# Altium PCB 25H_V2.PcbDoc
Units mm, origin at the board's own origin, x right, y up, seen from the top; angles counter-clockwise.
Board outline 152.4 x 101.6 mm, 2 copper layers (Top Layer, Bottom Layer); 11 components, 18 nets, 69 pads, 9 vias.
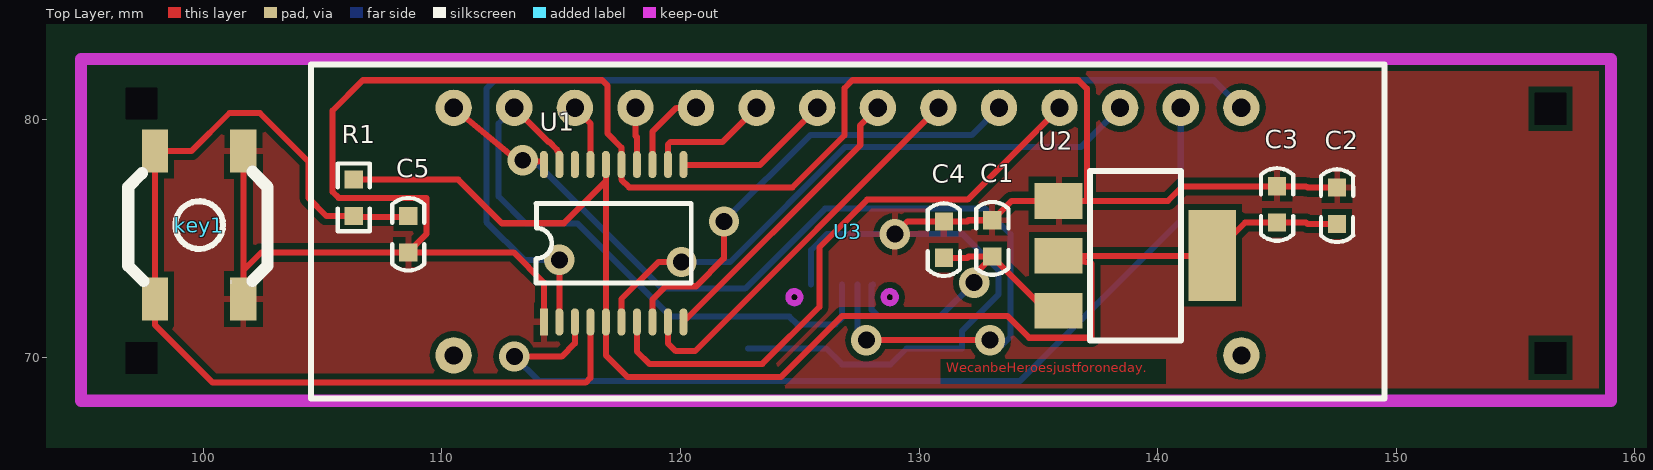
[diagram p0: Top Layer view]
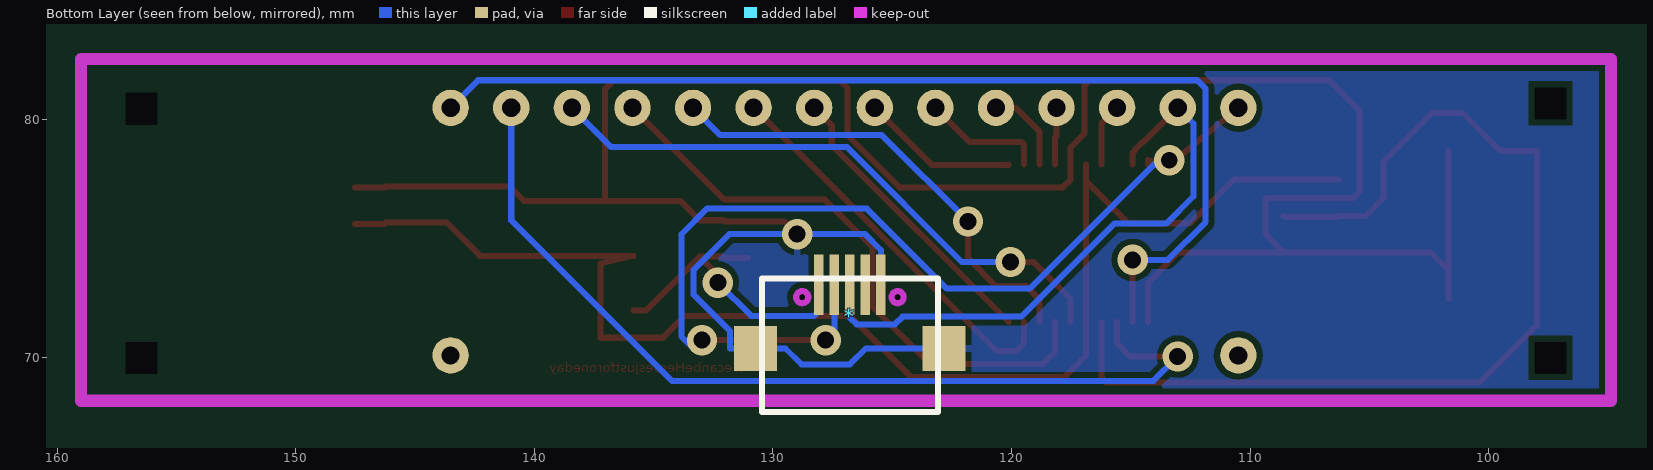
[diagram p1: Bottom Layer view, seen from below]
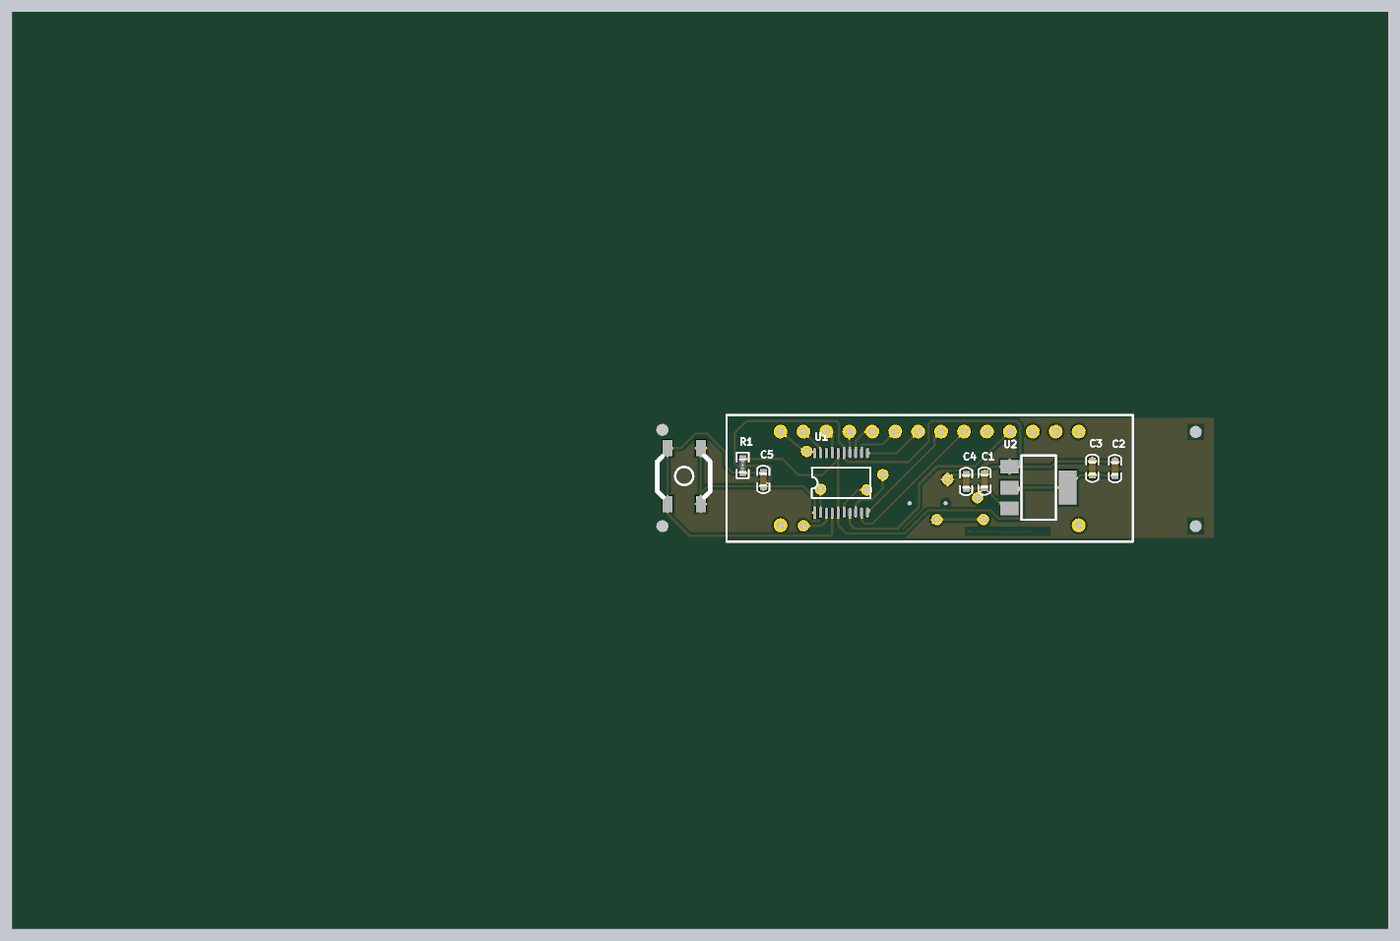
[diagram p2: 3D render of the assembled board from above, using the file's embedded part models]

## Layer stack, top to bottom
Top Solder: solder mask 0.0102, Solder Resist, Dk 3.5
Top Layer: signal copper 0.0356
Dielectric 1: dielectric 0.32, FR-4, Dk 4.8
Bottom Layer: signal copper 0.0356
Bottom Solder: solder mask 0.0102, Solder Resist, Dk 3.5

## Board outline
25.4,25.4 177.8,25.4 177.8,127 25.4,127

## Design rules (kind name [scope] priority, off if disabled: settings)
Clearance [All] p1: gap=0.254 ignorepadtopadclearanceinfootprint=FALSE except(0: Arc-Hole Track-Hole SMDPad-Hole THPad-Hole Via-Hole Fill-Hole Poly-Hole Region-Hole Text-Hole)
ComponentClearance [All] p1 off: gap=0.254 collisioncheckmode=3 verticalgap=0.254 showdistances=FALSE
PolygonConnect [All] p1: connectstyle=Relief reliefconductorwidth=0.254 reliefentries=4 polygonreliefangle="90 Angle" airgapwidth=0.254
RoutingVias [All] p1: holewidth=0.711 width=1.27 viastyle="Through Hole" minholewidth=0.711 minwidth=1.27 maxholewidth=0.711 maxwidth=1.27
SolderMaskExpansion [All] p1: expansion=0.102
Width [All] p1: maxlimit=0.254 minlimit=0.254 preferedwidth=0.254
29 further rules are at their usual default settings.

## Components (designator, comment, footprint, x,y, rotation, side; value= is the part's Value field where it differs from the comment)
* "MicroUSB" MicroUSB 126.771,71.73 r90 bottom
C1 "0.1uF" C0603 133.071,74.244 r90 top
C2 "0.1uF" C0603 147.523,75.616 r90 top
C3 "10uF" C0603 145.009,75.667 r90 top
C4 "10uF" C0603 131.039,74.193 r90 top
C5 "0.1uF" C0603 108.585,75.946 r270 top
key1 "KEY" KEY4*4*1.7 99.822,75.565 r90 top
R1 "10K" R0603 106.299,77.47 r270 top
U1 "STM32F030F4" TSSOP-20 113.839,70.866 r90 top
U2 "1117 3.3" SOT223 135.851,76.578 r270 top
U3 "6SMG" 6SMG 126.999,75.293 r180 top

## Footprints (in the part's own frame and the unit in brackets; to place one, negate y for a bottom-side part, rotate by r counter-clockwise, add the part's x,y. Pads: shape width x height; smd on the part's side, far side on the other; paste and mask are expansions set on the pad)
6SMG [mil]
  round 60 hole 30: 1(-649.98,-204.29) 2(-549.98,-204.29) 3(-449.98,-204.29) 4(-349.98,-204.29) 5(-249.98,-204.29) 6(-149.98,-204.29) 7(-49.98,-204.29) 8(50.02,-204.29) 9(150.02,-204.29) 10(250.02,-204.29) 11(350.02,-204.29) 12(450.02,-204.29) 13(550.02,-204.29) 14(650.02,-204.29) 15(650.02,204.29) 16(-650.02,204.29)
  silkscreen extent -886,-276 885,275
C0603 [mil]
  rect 30x30 smd: 1(0,0) 2(60,0)
  silkscreen extent -30,-27 90,27, body extent -1,-16 62,15, height 24
KEY4*4*1.7 [mm] "KEY?"
  rect 1.8x1.1 smd: 1(-3.1,1.85) 1(3.1,1.85) 2(-3.1,-1.85) 2(3.1,-1.85)
  silkscreen extent -2.47,-2.87 2.23,2.98
MicroUSB [mm]
  rect 1.9x1.8 smd: 0(-1.338,-3.95) 0(-1.338,3.95)
  rect 2.54x0.4 smd mask+0.102: 1(1.338,1.3)
  rect 2.54x0.4 smd: 2(1.338,0.65) 3(1.338,0) 4(1.338,-0.65) 5(1.338,-1.3)
  round 0 hole 0.5 unplated: MH1(0.812,-2) MH1(0.812,2)
  Keep-Out Layer circle w0.254: c0.813,2 r0.254
  Keep-Out Layer circle w0.254: c0.813,-2 r0.254
  silkscreen extent -4.01,-3.7 1.59,3.68
R0603 [mil]
  rect 30x30 smd: 1(0,0) 2(60,0)
  silkscreen extent -27,-27 85,27, body extent -1,-16 62,15, height 18
SOT223 [mil]
  rect 59x79 smd: 1(0,0) 2(90.55,0) 3(181.1,0)
  rect 150x79 smd: 4(89.88,253.54)
  silkscreen extent -49,52 231,202
TSSOP-20 [mm]
  rect 1.143x0.33 smd: 1(0.635,-0.432)
  oval 1.143x0.33 smd: 2(0.635,-1.082) 3(0.635,-1.732) 4(0.635,-2.382) 5(0.635,-3.032) 6(0.635,-3.682) 7(0.635,-4.332) 8(0.635,-4.982) 9(0.635,-5.632) 10(0.635,-6.282) 11(7.235,-6.282) 12(7.235,-5.632) 13(7.235,-4.982) 14(7.235,-4.332) 15(7.235,-3.682) 16(7.235,-3.032) 17(7.235,-2.382) 18(7.235,-1.732) 19(7.235,-1.082) 20(7.235,-0.432)
  silkscreen extent 2.27,-6.61 5.6,-0.11

## Part data
C1 C2 C3 C4 C5: library part CAP
R1: library part RES

## Free pads (board coordinates)
  rrect50% 0x0 hole 1.321 square: 17(97.409,70.002) 17(97.409,80.67) 17(156.464,70.002) 17(156.464,80.442)

## Via types
v1: diameter 1.27, hole 0.711, Top Layer to Bottom Layer, 9 vias

## Nets (pads, with @x,y where several pads share a name; then routed paths per layer and width w, separated by ;. In a path a pad name is that pad's centre, name@x,y a point inside that pad or via, vN(x,y) a via of type N, cw(c..) or ccw(c..) an arc to the next point about the centre after c; other vN are vias at no path point)
+3V3: C2.1 C3.1 R1.1 U1.5 U1.16 U2.2 U2.4 | length 59.1
  Top Layer w0.254: R1.1 110.684,77.47 112.513,75.641 115.113,75.641 116.871,77.4 ; U1.16 116.871,77.4 ; C2.1 146.279,75.616 146.228,75.667 C3.1 143.662,75.667 U2.4 142.291,74.278 U2.2 137.236,73.948 137.236,70.841 134.614,70.841 133.7,71.755 126.771,71.755 124.206,69.19 117.786,69.19 116.871,70.104 U1.5 116.871,77.4
+5V: *.1 C1.1 C4.1 U2.3 | length 13.3
  Top Layer w0.254: C4.1 132.029,74.193 132.08,74.244 C1.1 ; v1(132.309,73.152) 132.309,73.482 C1.1 ; U2.3 135.337,71.978 C1.1
  Bottom Layer w0.254: *.1 128.071,73.05 128.009,73.05 128.009,72.016 128.27,71.755 130.912,71.755 v1(132.309,73.152)
D1: U1.2 U3.1 | length 44.2
  Top Layer w0.254: U1.2 v1(114.921,74.106)
  Bottom Layer w0.254: v1(114.921,74.106) 113.446,74.106 111.862,75.69 111.862,81.28 112.217,81.636 142.355,81.636 U3.1
D2: U1.3 U3.2 | length 39.5
  Top Layer w0.254: v1(113.031,70.053) 115.012,70.053 115.571,70.612 U1.3
  Bottom Layer w0.254: v1(113.031,70.053) 114.047,69.037 134.239,69.037 140.969,75.767 U3.2
D3: U1.6 U3.3 | length 25.2
  Top Layer w0.254: U1.6 117.521,72.466 119.071,74.016 v1(120.04,74.016)
  Bottom Layer w0.254: v1(120.04,74.016) 122.072,74.016 126.888,78.831 136.778,78.831 U3.3
D4: U1.7 U3.4 | length 25.1
  Top Layer w0.254: U1.7 118.171,70.266 118.694,69.743 123.434,69.743 125.827,72.136 125.827,74.63 127.828,76.632 132.039,76.632 U3.4
D5: U1.8 U3.5 | length 19.7
  Top Layer w0.254: U1.8 118.821,72.441 119.38,73 120.65,73 121.818,74.168 v1(121.818,75.717)
  Bottom Layer w0.254: v1(121.818,75.717) 125.441,79.339 132.206,79.339 U3.5
D6: U1.9 U3.6 | length 16.6
  Top Layer w0.254: U1.9 119.471,70.612 119.804,70.279 120.606,70.279 U3.6
GND: *.0 *.5 C1.2 C2.2 C3.2 C4.2 C5.2 key1.2 U1.1 U1.15 U2.1 | length 118.2
  Top Layer w0.254: key1.2@101.672,72.465 101.672,73.66 ; key1.2@101.672,78.665 101.672,73.66 ; U1.1 114.271,73.152 113.001,74.422 C5.2 ; v1(128.981,75.184) 129.515,75.717 C4.2 132.029,75.717 132.08,75.768 C1.2 133.88,76.578 U2.1 137.033,76.578 ; C2.2 146.279,77.14 146.228,77.191 C3.2 141.049,77.191 140.437,76.578 137.033,76.578 ; 101.672,73.66 102.434,74.422 C5.2 ; C5.2 109.347,75.184 109.347,76.708 105.664,76.708 105.41,76.962 105.41,80.366 106.68,81.636 116.713,81.636 116.942,81.407 116.942,79.396 117.521,78.816 U1.15 117.521,77.47 117.847,77.144 124.693,77.144 126.873,79.324 126.873,81.305 127.203,81.636 136.677,81.636 137.033,81.28 137.033,76.578
  Bottom Layer w0.254: *.0@122.821,70.392 126.102,70.392 126.771,69.723 128.803,69.723 129.472,70.392 130.721,70.392 131.795,70.392 131.795,71.12 133.325,72.65 133.325,73.685 131.826,75.184 v1(128.981,75.184) 126.136,75.184 125.471,74.519 *.5
RST: C5.1 key1.1 R1.2 U1.4 | length 43
  Top Layer w0.254: C5.1 108.534,75.895 106.35,75.895 R1.2 105.156,75.946 104.395,76.707 104.395,78.231 102.362,80.264 101.092,80.264 99.492,78.664 97.972,78.664 97.972,72.465 97.972,71.37 100.381,68.961 116.018,68.961 116.221,69.164 U1.4
W1: *.2 U1.20 U3.14 | length 42.7
  Top Layer w0.254: U3.14 113.286,78.162 v1@113.386,78.08 ; v1(113.386,78.283) v1@113.386,78.08 ; U1.20 114.271,78.283 114.232,78.274 113.43,78.09 v1@113.386,78.08 ; v1(127.787,70.739) v1(132.969,70.739)
  Bottom Layer w0.254: v1(113.386,78.283) 113.843,78.283 119.228,72.898 122.707,72.898 126.06,76.251 132.766,76.251 133.833,75.184 133.833,70.891 133.325,70.383 v1(132.969,70.739) ; *.2 127.421,71.105 v1(127.787,70.739)
W2: *.3 U1.19 U3.13 | length 25.3
  Top Layer w0.254: U3.13 114.457,79.053 114.497,79.053 114.817,78.734 114.817,78.694 114.921,78.59 U1.19
  Bottom Layer w0.254: U3.13 112.37,79.823 112.37,76.774 113.519,75.624 115.69,75.624 119.585,71.73 124.562,71.73 124.892,71.399 126.492,71.399 126.771,71.679 *.3
W3: U1.17 U3.12 | length 2.7
  Top Layer w0.254: U3.12 116.221,79.83 U1.17
W4: U1.14 U3.11 | length 2.4
  Top Layer w0.254: U3.11 118.109,79.31 118.171,79.248 U1.14
W5: U1.13 U3.10 | length 3.6
  Top Layer w0.254: U1.13 118.821,79.477 119.827,80.482 U3.10
W6: U1.12 U3.9 | length 5.2
  Top Layer w0.254: U1.12 119.471,78.943 119.583,79.055 121.762,79.055 U3.9
W7: U1.11 U3.8 | length 6.6
  Top Layer w0.254: U1.11 120.121,78.08 123.327,78.08 U3.8
W8: U1.10 U3.7 | length 12.4
  Top Layer w0.254: U1.10 127.533,78.913 127.533,79.746 U3.7
pads on no net: *.4 *.MH1 U1.18 U3.15 U3.16

## Polygon pours and split planes (outlines as drawn)
GND on Top Layer (solid, remove dead copper, pour order 28): 94.869,82.525 94.869,68.199 159.004,68.199 159.004,82.525 158.877,82.398 94.971,82.398 94.971,82.474 94.92,82.525
no net on Top Layer "Top Layer-No Net 2" (solid, remove dead copper, pour order 10): 94.869,82.525
no net on Top Layer "Top Layer-No Net" (hatched 45Degree grid 0.508 track 0.203, remove dead copper, pour order 2): 94.869,82.296
GND on Bottom Layer (solid, remove dead copper, pour order 30): 94.869,82.525 94.869,68.199 159.004,68.199 159.004,82.525

## Keep-outs
Keep-Out Layer:
  lines w0.508: 94.869,68.199 159.004,68.199 159.004,82.525 152.298,82.525 94.869,82.525 94.869,68.199

## Other copper
Top Layer:
  text "WecanbeHeroesjustforoneday." at 131.14,69.24 h0.69

## Silkscreen, mask and mechanical layers (free items; w line width, h text height)
Mechanical 1:
  pour cut-out: 99.695,61.468